# Altium PCB Wenzel_REF.PCBDOC (part 5 of 7)
Units mm, origin at the board's own origin, x right, y up, seen from the top; angles counter-clockwise.
Board outline 222.63 x 100.1 mm, 4 copper layers (Top, L2, L3, Bot), stack 1.6 mm thick; 406 components, 236 nets, 1324 pads, 1362 vias.
Unrouted connection lines stored in the file: 1.
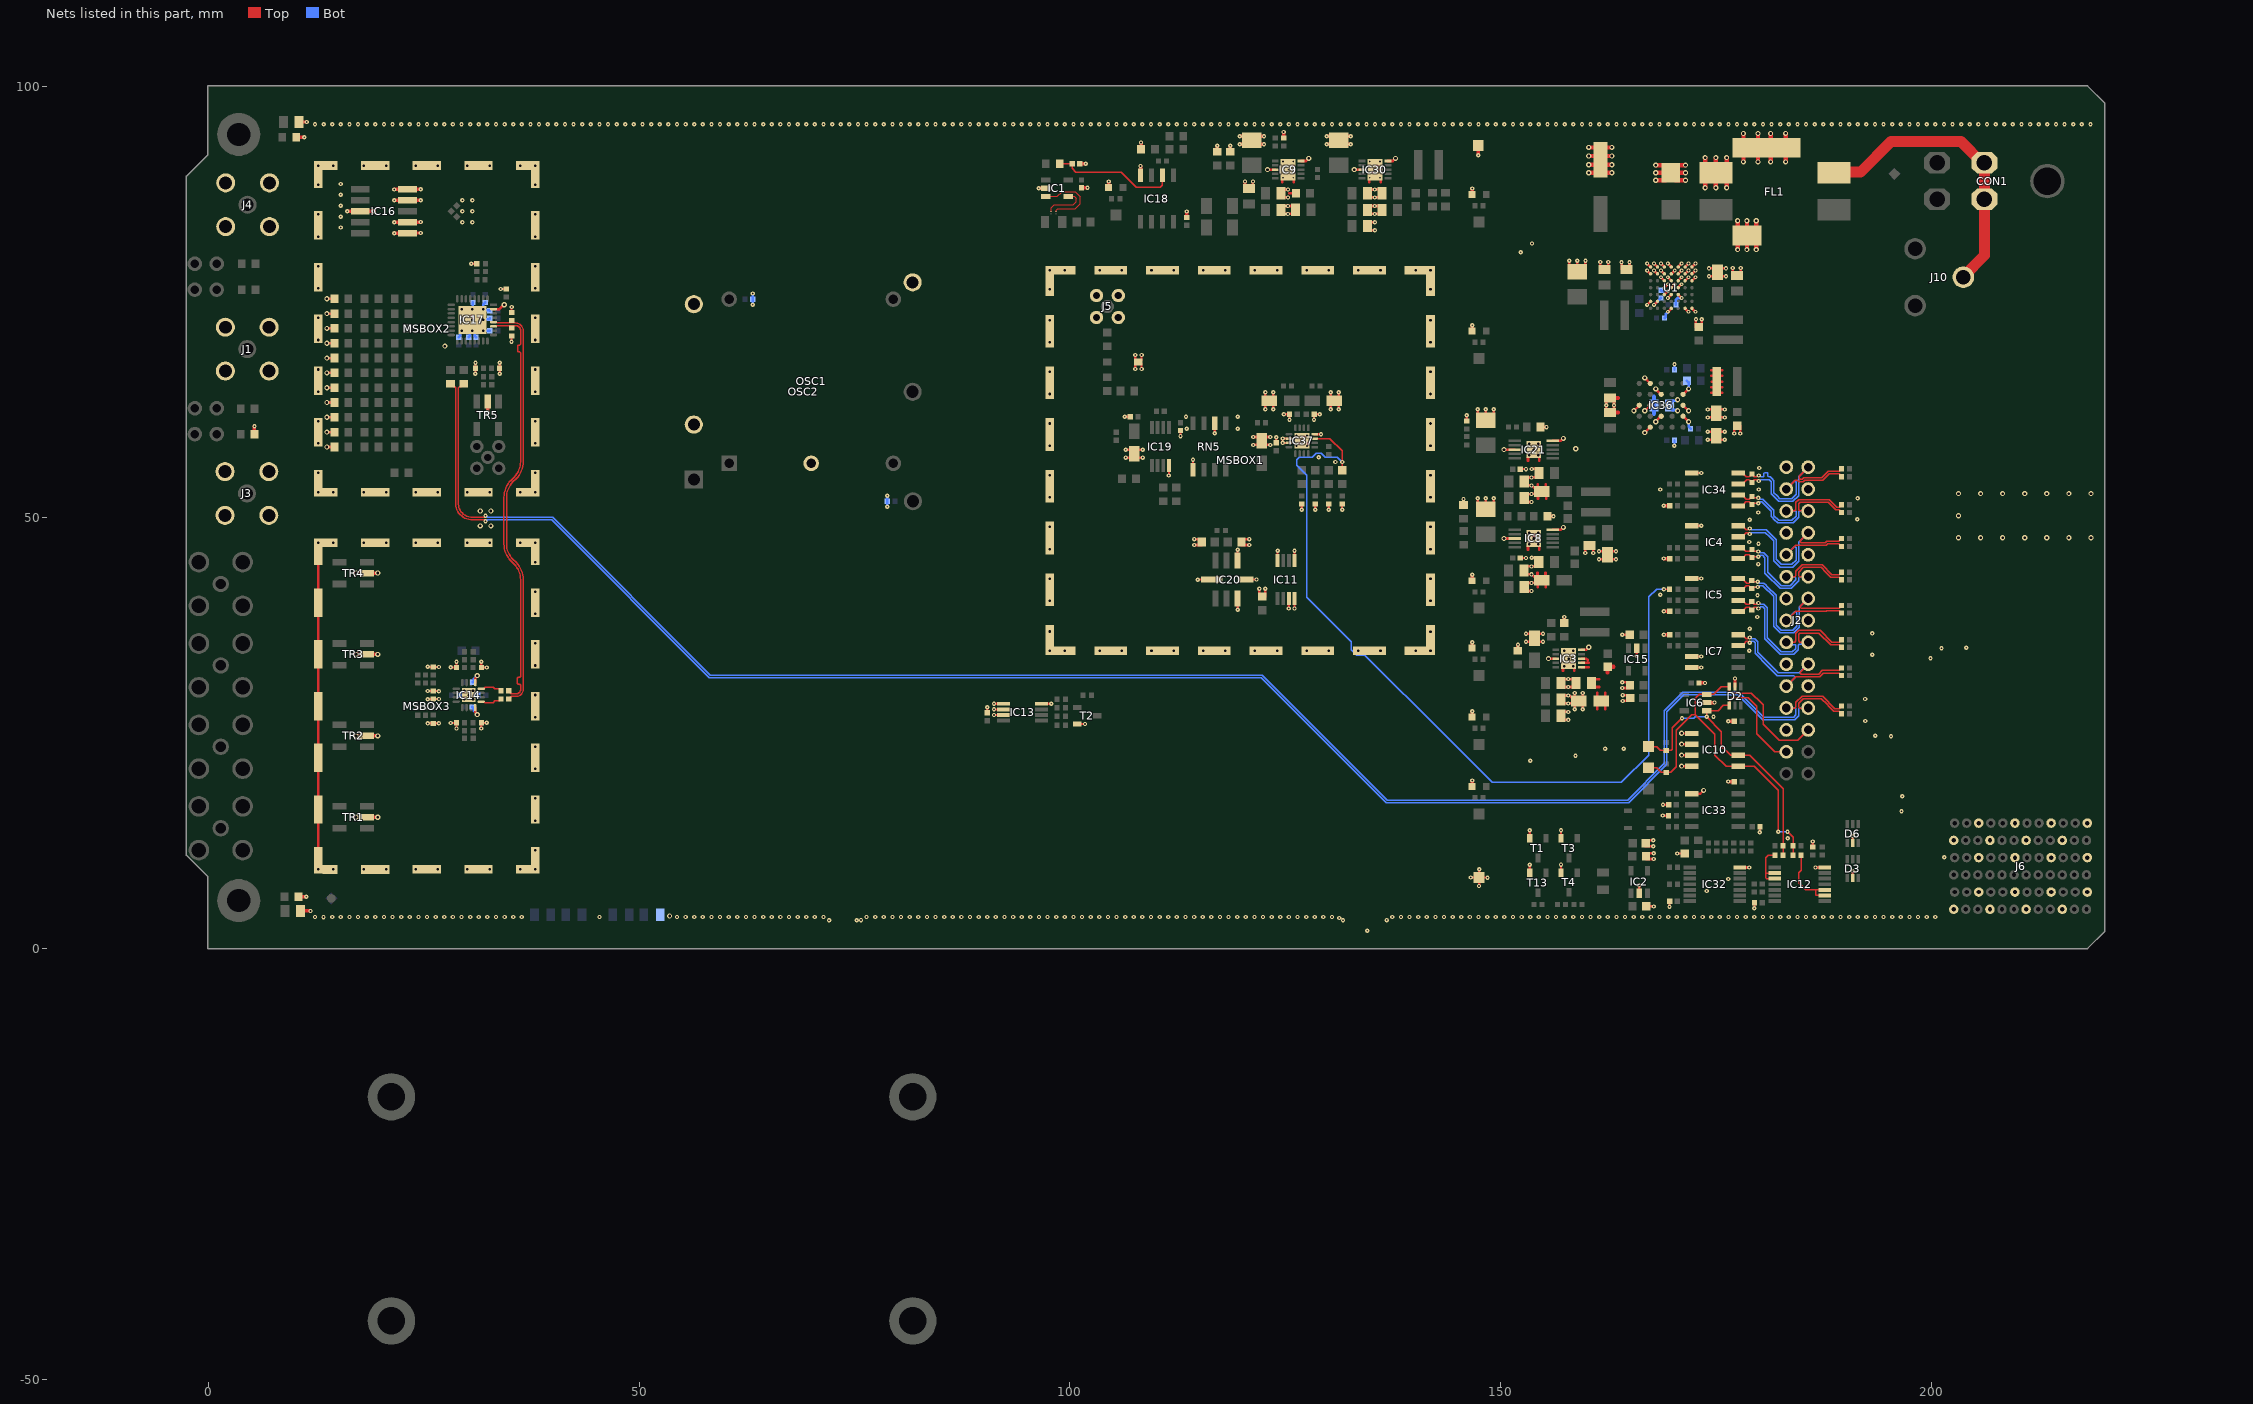
[diagram p5: the nets of this part, all layers, seen from the top]

## Via types
v1: diameter 0.5, hole 0.2, Top to Bot, tented both sides, 654 vias
v2: diameter 0.6, hole 0.3, Top to Bot, 478 vias
v3: diameter 0.5, hole 0.2, Top to Bot, 196 vias
v4: diameter 0.45, hole 0.2, Top to Bot, 34 vias

## Nets (pads, with @x,y where several pads share a name; then routed paths per layer and width w, separated by ;. In a path a pad name is that pad's centre, name@x,y a point inside that pad or via, vN(x,y) a via of type N, cw(c..) or ccw(c..) an arc to the next point about the centre after c; other vN are vias at no path point) (continued)
GND: C1.1 C2.1 C3.1 C4.1 C5.1 C6.1 C7.1 C8.1 C10.1 C12.2 C13.1 C14.1 C16.1 C17.1 C19.1 C21.1 C23.1 C24.1 C26.2 C27.1 C28.1 C30.1 C31.1 C32.2 C33.1 C36.1 C38.1 C39.1 C40.1 C42.1 C43.1 C44.1 C45.1 C48.1 C49.1 C52.1 C53.1 C54.1 C55.1 C56.1 C57.1 C58.1 C59.1 C60.2 C61.1 C62.1 C65.1 C67.2 C69.2 C70.1 C71.1 C72.1 C73.1 C74.1 C75.2 C76.1 C77.2 C78.1 C79.1 C80.1 C81.1 C82.1 C83.1 C84.1 C85.2 C86.1 C87.1 C88.1 C89.1 C90.1 C91.2 C92.1 C93.2 C94.1 C95.2 C96.1 C97.2 C98.2 C99.2 C100.1 C101.2 C102.2 C103.1 C104.1 C105.1 C108.1 C117.1 C121.1 C122.1 C123.2 C124.2 C125.1 C138.2 C142.1 C143.1 C149.1 C154.1 C167.1 D2.2 D3.2 D4.2 D6.2 D11.2 FL1.4 IC1.2 IC2.2 IC3.5 IC3.8 IC3.11 IC4.5 IC5.5 IC6.2 IC7.3 IC7.4 IC8.5 IC8.8 IC8.11 IC9.5 IC9.8 IC9.11 IC10.1 IC10.2 IC10.3 IC10.4 IC11.3 IC11.4 IC11.5 IC11.8 IC12.7 IC13.4 IC13.5 IC13.6 IC13.7 IC14.5 IC14.16 IC14.17 IC15.2 IC16.1 IC16.2 IC16.4 IC16.5 IC16.8 IC17.31 IC17.33 IC18.4 IC19.4 IC20.3 IC20.4 IC20.5 IC20.8 IC21.5 IC21.8 IC21.11 IC30.5 IC30.8 IC30.11 IC32.7 IC33.1 IC34.5 IC36.B5 IC36.C1 IC36.C2 IC36.C5 IC36.D5 IC37.2 IC37.3 IC37.12 IC37.17 J1.2 J2.1 J2.4 J2.7 J2.10 J2.13 J2.16 J2.19 J2.22 J2.25 J3.2 J4.2 J5.2 J6.A2 J6.A4 J6.A6 J6.C1 J6.C5 J6.D2 J6.D4 J6.D6 J6.F1 J6.F5 J6.G2 J6.G4 J6.G6 J6.I1 J6.I5 J6.J2 J6.J4 J6.J6 J6.L1 J6.L5 LD1.1 LD2.1 LD3.1 LD4.1 LD8.1 LD10.1 LD11.1 MSBOX1.1 MSBOX1.2 MSBOX1.3 MSBOX1.4 MSBOX1.5 MSBOX1.6 MSBOX1.7 MSBOX1.8 MSBOX1.9 MSBOX1.10 MSBOX1.11 MSBOX1.12 MSBOX1.13 MSBOX1.14 MSBOX1.15 MSBOX1.16 MSBOX1.17 MSBOX1.18 MSBOX1.19 MSBOX1.20 MSBOX1.21 MSBOX1.22 MSBOX1.23 MSBOX1.24 MSBOX1.25 MSBOX1.26 MSBOX1.27 MSBOX1.28 MSBOX2.1 MSBOX2.2 MSBOX2.3 MSBOX2.4 MSBOX2.5 MSBOX2.6 MSBOX2.7 MSBOX2.8 MSBOX2.9 MSBOX2.10 MSBOX2.11 MSBOX2.12 MSBOX2.13 MSBOX2.14 MSBOX2.15 MSBOX2.16 MSBOX2.17 MSBOX2.18 MSBOX2.19 MSBOX2.20 MSBOX3.1 MSBOX3.2 MSBOX3.3 MSBOX3.4 MSBOX3.5 MSBOX3.6 MSBOX3.7 MSBOX3.8 MSBOX3.9 MSBOX3.10 MSBOX3.11 MSBOX3.12 MSBOX3.13 MSBOX3.14 MSBOX3.15 MSBOX3.16 MSBOX3.17 MSBOX3.18 MSBOX3.19 MSBOX3.20 OSC1.2 OSC2.4 OSC2.5 OSC2.6 R11.1 R21.1 R22.2 R23.2 R25.2 R26.1 R27.2 R29.2 R30.1 R32.1 R39.2 R41.2 R42.1 R47.1 R50.1 R51.1 R64.2 R68.2 R69.2 R70.2 R73.1 R74.2 R77.1 R79.2 R80.1 R83.2 R86.2 R89.2 R93.2 R96.2 R99.2 R100.2 R101.2 R104.2 R107.2 R110.2 R114.2 R116.1 R118.2 R129.1 R130.1 R132.2 R142.1 R147.1 R155.2 R163.2 R165.2 R170.2 RN5.2 RN5.5 T1.2 T2.2 T3.2 T4.2 T13.2 TP3.1 TP4.1 TR1.2 TR2.2 TR3.2 TR4.2 TR5.2 U1.A1 U1.A2 U1.A3 U1.A7 U1.B1 U1.B2 U1.B3 U1.B7 U1.C1 U1.C2 U1.C3 U1.C4 U1.C5 U1.D1 U1.D2 U1.D3 U1.D4 U1.D5 U1.D7 U1.E1 U1.E2 U1.E3 U1.E4 U1.E5 U1.F1 U1.F2 U1.G1 U1.G2 U1.G6 | length 388.1
  Top w0.2: 147.372,92.244 TP4.1@147.372,93.119
  Top w0.254: v1@25.492,26.086 R68.2@26.127,26.086 v1@26.762,26.086 ; v1@25.492,28.896 R25.2@26.127,28.896 v1@26.762,28.896 ; v1@25.492,29.816 R27.2@26.127,29.816 v1@26.762,29.816 ; v1@25.492,32.626 R69.2@26.127,32.626 v1@26.762,32.626 ; v1@28.178,26.135 R23.2@28.813,26.135 v1@28.813,25.5 ; v1@28.178,32.565 R29.2@28.813,32.565 v1@28.813,33.2 ; v1@30.544,79.407 C49.1@31.18,79.407 ; v1@31.017,66.642 R79.2@31.017,67.278 v1@31.017,67.913 ; v1@31.693,25.5 R22.2@31.693,26.135 v1@32.328,26.135 ; v1@31.693,33.2 R70.2@31.693,32.565 v1@32.328,32.565 ; v1@33.837,66.642 R80.1@33.837,67.278 v1@33.837,67.913 ; v1@33.976,76.466 R77.1@34.611,76.466 ; v1@35.214,70.366 R73.1@35.214,71.001 ; R74.2@35.214,73.744 v1@35.214,74.38 ; C33.1@90.4,27.299 v1@90.4,27.935 ; v1@91.187,27.061 v1@91.193,27.055 ; v1@91.187,27.711 v1@91.193,27.705 ; v1@91.187,28.361 v1@91.193,28.355 ; v1@91.193,27.049 IC13.7@91.832,27.049 ; v1@91.193,27.699 IC13.6@91.832,27.699 ; v1@91.193,28.349 IC13.5@91.832,28.349 ; IC13.4@97.162,28.349 IC13.4@97.168,28.343 ; IC13.4@97.168,28.349 v1@97.807,28.349 ; v1@97.807,28.343 v1@97.813,28.338 ; T2.2@101,26.012 T2.2@101.012,26.001 ; T2.2@101.012,26.012 v1@101.734,26.012 ; v1@101.734,26.018 v1@101.746,26.007 ; v1@106.348,61.645 C70.1@106.999,61.645 ; v1(107.569,67.182) D4.2@107.57,67.833 ; D4.2@107.57,68.167 v1@107.57,68.817 ; v1(108.31,67.182) D4.2@108.31,67.833 ; D4.2@108.31,68.167 v1@108.31,68.817 ; v1(111.475,54.843) IC19.4@111.475,55.717 ; v1(112.82,59.408) C67.2@112.819,60.059 ; RN5.5@114.262,55.778 v1(114.262,56.652) ; v1(114.822,42.755) IC20.8@115.696,42.755 ; v1(116.802,59.747) RN5.2@116.802,60.621 ; IC20.5@119.451,45.332 v1(119.451,46.207) ; v1(119.462,39.265) IC20.3@119.462,40.139 ; IC20.4@120.773,42.765 v1(121.647,42.765) ; C71.1@123.936,58.625 v1@123.936,59.276 ; IC11.8@124.092,45.23 v1(124.092,46.105) ; v1@124.657,59.134 v1(124.672,59.12) ; v1(124.672,58.62) v1(124.672,59.12) ; v1@124.673,58.621 IC37.3@125.396,58.621 ; v1(124.819,61.945) C142.1@125.471,61.946 ; v1(125.392,39.399) IC11.3@125.392,40.273 ; IC37.2@125.396,59.121 124.673,59.121 v1(124.672,59.12) ; v1(125.472,61.293) C142.1@125.471,61.946 ; v1(126.042,39.399) IC11.4@126.042,40.273 ; IC11.5@126.042,45.23 v1(126.042,46.105) ; v1(126.898,50.859) R170.2@126.897,51.51 ; v1@128.322,61.295 C143.1@128.322,61.945 ; C143.1@128.322,61.947 v1@128.973,61.947 ; IC37.12@128.396,59.621 v1(129.121,59.622) ; v1@128.457,50.855 R64.2@128.456,51.506 ; v1@128.982,59.599 v1@128.983,59.601 ; v1@130.016,50.855 R163.2@130.015,51.506 ; v1@131.575,50.859 R165.2@131.575,51.511 ; R142.1@146.032,61.171 v1@146.032,61.806 ; v1@146.512,8.189 TP3.1@147.147,8.189 ; v1@147.474,7.227 TP3.1@147.474,7.862 ; TP3.1@147.475,8.517 v1@147.475,9.152 ; TP3.1@147.802,8.189 v1@148.437,8.189 ; C31.1@152.258,45.257 v1@152.893,45.257 ; C90.1@152.258,55.578 v1@152.893,55.578 ; T13.2@153.344,9.022 v1@153.344,9.658 ; T1.2@153.344,13.028 v1@153.344,13.663 ; T4.2@156.96,9.042 v1@156.96,9.677 ; T3.2@156.96,13.028 v1@156.96,13.663 ; v1@168.801,15.365 R147.1@169.436,15.365 ; v3@168.821,16.635 C81.1@169.456,16.635 ; v1@169.574,4.81 C36.1@169.574,5.445 ; v1(170.457,10.973) C79.1@171.331,10.973 ; v2(170.964,21.124) 170.964,21.104 IC10.4@172.243,21.104 ; v2(170.964,22.394) 170.964,22.374 IC10.3@172.243,22.374 ; v2(170.964,23.664) 170.964,23.644 IC10.2@172.243,23.644 ; v2(170.964,24.934) 170.964,24.914 IC10.1@172.243,24.914 ; C79.1@171.291,10.858 C79.1@171.332,10.899 ; IC33.1@172.132,17.905 172.143,17.916 173.14,17.916 v2(173.522,18.298) ; IC7.4@172.137,32.561 173.224,32.561 v1(173.229,32.566) ; IC7.3@172.137,33.831 v1@173.224,33.831 ; IC5.5@172.136,42.89 173.223,42.89 v1(173.228,42.894) ; IC4.5@172.137,49.003 173.223,49.003 v1(173.228,49.008) ; IC34.5@172.137,55.116 173.223,55.116 v1(173.228,55.121) ; v1@179.419,4.648 C78.1@179.419,5.283 ; v1@180.052,13.447 C82.1@180.052,14.082 ; R50.1@186.18,11.719 v1@186.18,12.354
  Top w0.3: MSBOX3.7@12.768,10.18 MSBOX3.6@12.768,16.08 MSBOX3.5@12.768,22.08 MSBOX3.4@12.768,28.08 MSBOX3.3@12.768,34.08 MSBOX3.2@12.768,40.08 MSBOX3.1@12.768,45.98 ; v2(13.779,58.147) R83.2@14.672,58.147 ; v2(13.779,59.866) R86.2@14.672,59.866 ; v2(13.779,61.586) R89.2@14.672,61.586 ; v2(13.779,63.305) R93.2@14.672,63.305 ; v2(13.779,65.025) R96.2@14.672,65.025 ; v2(13.779,66.744) R101.2@14.672,66.744 ; v2(13.779,68.464) R104.2@14.672,68.464 ; v2(13.779,70.183) R107.2@14.672,70.183 ; v2(13.779,71.903) R110.2@14.672,71.903 ; v2(13.779,73.622) R114.2@14.672,73.622 ; v2(13.779,75.342) R132.2@14.672,75.342 ; IC14.16@30.986,27.906 30.986,27.403 31.217,27.172 v2(31.217,27.091) ; IC14.5@30.986,30.806 30.986,31.309 31.217,31.54 v2(31.217,31.621) ; IC17.31@33.112,74.14 33.795,74.14 34.23,74.575 34.354,74.575 v2@34.359,74.57 ; v3(106.463,56.912) C69.2@107.44,56.912 ; v3(106.463,57.838) C69.2@107.435,57.838 ; C69.2@107.431,56.885 107.458,56.912 v3(108.435,56.912) ; C69.2@107.431,57.805 107.464,57.838 v3(108.435,57.838) ; v3(114.42,46.774) 114.423,46.777 C167.1@115.321,46.777 ; v3(114.42,47.456) 114.423,47.453 C167.1@115.321,47.453 ; C94.1@119.886,46.777 120.784,46.777 v3(120.787,46.774) ; C94.1@119.886,47.453 120.784,47.453 v3(120.787,47.456) ; C6.1@120.309,88.049 v3@120.309,88.947 ; C6.1@121.229,88.049 v3@121.229,88.947 ; v3(121.266,58.382) 122.238,58.382 C138.2@122.27,58.414 ; v3(121.266,59.307) 122.243,59.307 C138.2@122.27,59.334 ; v3(121.976,41.685) 121.979,41.682 C149.1@121.979,40.784 ; C138.2@122.262,59.307 v3(123.239,59.307) ; C138.2@122.267,58.382 v3(123.239,58.382) ; C12.2@122.645,63.537 122.672,63.51 v3(122.672,62.533) ; C149.1@122.655,40.784 122.655,41.682 v3(122.658,41.685) ; C12.2@122.672,63.528 v3(122.672,64.505) ; v2@122.919,90.313 122.932,90.327 IC9.8@123.81,90.327 ; C12.2@123.565,63.537 123.597,63.504 v3(123.597,62.533) ; C12.2@123.597,63.534 v3(123.597,64.505) ; C5.1@124.383,85.186 v3@125.281,85.186 ; C5.1@124.383,86.106 v3@125.281,86.106 ; C4.1@124.397,87.102 v3@125.296,87.102 ; C4.1@124.397,88.022 v3@125.296,88.022 ; 124.649,88.843 IC9.11@124.649,89.405 ; v3@125.286,85.186 C23.1@126.185,85.186 ; v3@125.286,86.106 C23.1@126.185,86.106 ; 125.451,87.596 C3.1@126.232,87.596 ; 125.971,88.845 IC9.11@125.971,89.405 ; IC9.5@126.81,91.327 127.376,91.327 127.685,91.636 v2(127.702,91.636) ; C99.2@130.228,63.537 130.255,63.51 v3(130.255,62.533) ; C99.2@130.255,63.528 v3(130.255,64.505) ; C99.2@131.148,63.537 131.18,63.504 v3(131.18,62.533) ; C99.2@131.18,63.534 v3(131.18,64.505) ; v2@132.99,90.313 133.003,90.327 IC30.8@133.881,90.327 ; C122.1@134.454,85.186 v3@135.352,85.186 ; C122.1@134.454,86.106 v3@135.352,86.106 ; C117.1@134.468,87.102 v3@135.366,87.102 ; C117.1@134.468,88.022 v3@135.366,88.022 ; C121.1@134.479,83.289 v3(135.377,83.289) ; C121.1@134.479,84.209 v3(135.377,84.209) ; 134.72,88.843 IC30.11@134.72,89.405 ; v3@135.357,85.186 C1.1@136.256,85.186 ; v3@135.357,86.106 C1.1@136.256,86.106 ; v3@135.362,87.107 C108.1@136.261,87.107 ; v3@135.362,88.027 C108.1@136.261,88.027 ; 136.042,88.845 IC30.11@136.042,89.405 ; IC30.5@136.881,91.327 137.447,91.327 137.756,91.636 v2(137.772,91.636) ; v3(147.317,52.21) 147.32,52.207 C32.2@147.32,51.309 ; v3(147.317,62.53) 147.32,62.528 C91.2@147.32,61.629 ; v3@148.24,52.207 v3@148.242,52.21 ; v3@148.24,62.528 v3@148.242,62.53 ; C32.2@148.25,51.309 v3@148.25,52.207 ; C91.2@148.25,61.629 v3@148.25,62.528 ; C32.2@149.18,51.309 149.18,52.207 v3(149.182,52.21) ; C91.2@149.18,61.629 149.18,62.528 v3(149.182,62.53) ; v2(150.352,47.527) IC8.8@151.601,47.527 ; v2(150.352,57.847) IC21.8@151.601,57.847 ; C30.1@152.64,41.439 v3@153.538,41.439 ; C30.1@152.64,42.359 v3@153.538,42.359 ; C28.1@152.64,43.364 v3@153.538,43.364 ; C28.1@152.64,44.284 v3@153.538,44.284 ; C83.1@152.64,51.759 v3@153.538,51.759 ; C83.1@152.64,52.679 v3@153.538,52.679 ; C96.1@152.64,53.684 v3@153.538,53.684 ; C96.1@152.64,54.604 v3@153.538,54.604 ; v3(152.9,35.544) C101.2@153.877,35.544 ; v3(152.9,36.47) C101.2@153.871,36.47 ; 153.14,46.241 IC8.11@153.14,46.606 ; 153.14,56.561 IC21.11@153.14,56.926 ; v3@153.51,43.367 153.576,43.367 C26.2@154.329,42.613 ; v3@153.51,53.687 153.576,53.687 C85.2@154.329,52.934 ; v3@153.544,42.414 C26.2@154.286,42.414 ; v3@153.544,44.289 C27.1@154.442,44.289 ; v3@153.544,52.734 C85.2@154.442,52.734 ; v3@153.544,54.61 C92.1@154.442,54.61 ; v3@153.57,45.275 C27.1@154.469,45.275 ; v3@153.57,55.595 C92.1@154.469,55.595 ; C101.2@153.868,35.517 153.895,35.544 v3(154.872,35.544) ; C101.2@153.868,36.437 153.9,36.47 v3(154.872,36.47) ; C26.2@154.244,43.194 154.244,43.559 ; C85.2@154.264,53.469 154.264,53.834 ; 154.286,41.875 C26.2@154.286,42.414 ; C26.2@154.286,42.71 C26.2@154.286,42.414 ; 154.306,52.15 C85.2@154.306,52.985 ; C26.2@154.442,42.414 C26.2@154.286,42.414 ; 154.462,46.241 IC8.11@154.462,46.606 ; 154.462,56.561 IC21.11@154.462,56.926 ; C26.2@154.719,42.719 154.742,42.719 155.217,42.244 155.217,41.879 ; C85.2@154.739,52.994 154.762,52.994 155.237,52.519 155.237,52.154 ; C26.2@155.175,42.728 155.175,43.563 ; C85.2@155.195,53.003 155.195,53.838 ; v2@155.522,33.585 155.534,33.597 IC3.8@156.36,33.597 ; IC8.5@156.001,48.527 156.924,48.527 157.213,48.815 v2(157.25,48.815) ; IC21.5@156.001,58.847 156.924,58.847 157.213,59.136 v2(157.25,59.136) ; C16.1@156.897,26.482 v3@157.796,26.482 ; C16.1@156.897,27.402 v3@157.796,27.402 ; C14.1@156.897,28.39 v3@157.796,28.39 ; C14.1@156.897,29.31 v3@157.796,29.31 ; C17.1@156.897,30.299 v3@157.796,30.299 ; C17.1@156.897,31.219 v3@157.796,31.219 ; 157.199,32.188 IC3.11@157.199,32.676 ; v3@157.767,29.312 157.953,29.312 C102.2@158.358,28.907 ; v3@157.801,28.39 C102.2@158.699,28.39 ; v3@157.801,30.299 C2.1@158.699,30.299 ; v3@157.801,31.219 C2.1@158.699,31.219 ; v3(157.937,79.766) 157.94,79.764 C124.2@157.94,78.865 ; 158.521,32.188 IC3.11@158.521,32.676 ; v3(158.561,27.73) v3(158.561,29.603) ; C102.2@158.561,28.681 C102.2@158.594,28.649 ; v3@158.86,79.764 v3@158.863,79.766 ; C124.2@158.87,78.865 v3@158.87,79.764 ; IC3.5@159.36,34.597 159.872,34.597 160.183,34.908 v2(160.197,34.908) ; v3(159.487,27.73) v3(159.487,29.603) ; C102.2@159.487,28.676 C102.2@159.514,28.649 ; v3(159.796,45.844) 159.799,45.846 C65.1@159.799,46.745 ; C124.2@159.8,78.865 159.8,79.764 v3(159.803,79.766) ; C65.1@160.719,46.745 160.719,45.846 v3(160.722,45.844) ; v3(161.375,45.126) 162.347,45.126 C77.2@162.379,45.158 ; v3(161.375,46.051) 162.352,46.051 C77.2@162.379,46.078 ; v3(161.537,79.616) 161.54,79.613 C125.1@161.54,78.715 ; v3@162.238,62.98 162.238,62.589 C73.1@162.679,62.148 163.119,62.589 v3@163.119,62.98 ; v3@162.238,62.986 162.238,63.377 C21.1@162.679,63.818 163.119,63.377 v3@163.119,62.986 ; C77.2@162.371,46.051 v3(163.348,46.051) ; C77.2@162.376,45.126 v3(163.348,45.126) ; C125.1@162.46,78.715 162.46,79.613 v3(162.463,79.616) ; v3(163.991,79.586) 164.007,79.57 164.007,78.805 C72.1@164.097,78.715 ; v3@164.074,36.355 C100.1@164.972,36.355 ; v3(164.077,30.175) 164.08,30.178 C103.1@164.978,30.178 ; v3(164.077,30.857) 164.08,30.854 C103.1@164.978,30.854 ; v3(164.127,28.675) 164.13,28.678 C104.1@165.028,28.678 ; v3(164.127,29.357) 164.13,29.354 C104.1@165.028,29.354 ; C72.1@164.916,78.815 v3(164.916,79.586) ; v2(165.422,62.348) IC36.C1@166.057,62.983 ; v3(165.755,33.898) 165.758,33.901 165.758,34.799 IC15.2@165.76,34.802 ; IC2.2@166.046,6.389 166.049,6.392 166.049,7.29 v3(166.051,7.293) ; v2(166.692,62.348) IC36.C2@167.327,62.983 ; C13.1@166.778,11.837 167.677,11.837 v3(167.679,11.835) ; C13.1@166.778,12.514 167.677,12.514 v3(167.679,12.516) ; C10.1@166.828,10.337 167.727,10.337 v3(167.729,10.335) ; C10.1@166.828,11.014 167.727,11.014 v3(167.729,11.016) ; C8.1@166.834,4.836 v3@167.732,4.836 ; v4(166.966,74.632) U1.G6@167.366,75.032 ; v4(166.966,78.632) U1.G2@167.366,78.232 ; v4(166.966,79.432) U1.G1@167.366,79.032 ; v4(167.766,78.632) U1.F2@168.166,78.232 ; v4(167.766,79.432) U1.F1@168.166,79.032 ; v4(168.566,77.832) U1.E3@168.966,77.432 ; v4(168.566,78.632) U1.E2@168.966,78.232 ; v4(168.566,79.432) U1.E1@168.966,79.032 ; U1.E5@168.966,75.832 v4(169.366,76.232) ; U1.E4@168.966,76.632 v4(169.366,77.032) ; v4(169.366,73.832) U1.D7@169.766,74.232 ; v4(169.366,75.432) U1.D5@169.766,75.832 ; v4(169.366,77.832) U1.D3@169.766,77.432 ; v4(169.366,79.432) U1.D1@169.766,79.032 ; U1.D4@169.766,76.632 v4(170.166,77.032) ; U1.D2@169.766,78.232 v4(170.166,78.632) ; U1.C5@170.566,75.832 v4(170.966,75.432) ; U1.C4@170.566,76.632 v4(170.966,77.032) ; U1.C3@170.566,77.432 v4(170.966,77.832) ; U1.C2@170.566,78.232 v4(170.966,78.632) ; U1.C1@170.566,79.032 v4(170.966,79.432) ; IC36.D5@171.137,61.713 v2(171.772,61.078) ; IC36.C5@171.137,62.983 v2(171.772,62.348) ; IC36.B5@171.137,64.253 v2(171.772,64.888) ; U1.B7@171.366,74.232 v4(171.766,73.832) ; U1.B3@171.366,77.432 v4(171.766,77.832) ; U1.B2@171.366,78.232 v4(171.766,78.632) ; U1.B1@171.366,79.032 v4(171.766,79.432) ; U1.A7@172.166,74.232 v4(172.566,73.832) ; U1.A3@172.166,77.432 v4(172.566,77.832) ; U1.A2@172.166,78.232 v4(172.566,78.632) ; U1.A1@172.166,79.032 v4(172.566,79.432) ; v3(172.625,72.966) 172.628,72.963 C7.1@172.628,72.065 ; C7.1@173.304,72.065 173.304,72.963 v3(173.307,72.966) ; v3(173.986,58.976) 174.958,58.976 C75.2@174.99,59.008 ; v3(173.986,59.901) 174.963,59.901 C75.2@174.99,59.928 ; v3(174.134,77.94) 175.106,77.94 C60.2@175.138,77.972 ; v3(174.134,78.865) 175.111,78.865 C60.2@175.138,78.892 ; C75.2@174.981,59.901 v3(175.958,59.901) ; C75.2@174.987,58.976 v3(175.958,58.976) ; C60.2@175.129,78.865 v3(176.106,78.865) ; C60.2@175.135,77.94 v3(176.106,77.94) ; v3(176.907,78.916) 176.91,78.913 C105.1@176.91,78.015 ; v3(177.079,59.72) 177.082,59.723 C74.1@177.082,60.621 ; IC32.7@177.732,9.355 v3(178.828,9.355) ; v3@177.758,59.723 C74.1@177.758,60.621 ; C105.1@177.83,78.015 177.83,78.913 v3(177.833,78.916) ; v3(186.503,9.355) IC12.7@187.599,9.355 ; D3.2@190.825,8.117 v3(190.825,8.905) ; D6.2@190.825,12.193 v3(190.826,12.981)
  Top w0.4: R118.2@5.376,59.64 5.377,59.642 5.377,60.54 v1(5.379,60.541) ; R129.1@10.214,94.075 v1(11.139,94.075) ; R130.1@10.475,5.95 v1(11.4,5.95) ; C95.2@10.525,95.85 v1(11.45,95.85) ; C97.2@10.95,4.314 v1(11.875,4.314) ; v1(16.133,85.489) IC16.8@17.008,85.489 ; v2(17.187,15.18) TR1.2@18.08,15.18 ; v2(17.187,24.627) TR2.2@18.08,24.627 ; v2(17.187,34.073) TR3.2@18.08,34.073 ; v2(17.187,43.52) TR4.2@18.08,43.52 ; IC16.8@18.332,85.511 v1(19.207,85.511) ; TR1.2@18.78,15.18 v2(19.673,15.18) ; TR2.2@18.78,24.627 v2(19.673,24.627) ; TR3.2@18.78,34.073 v2(19.673,34.073) ; TR4.2@18.78,43.52 v2(19.673,43.52) ; v1(21.593,82.949) IC16.1@22.468,82.949 ; v1(21.593,84.219) IC16.2@22.468,84.219 ; v1(21.593,86.759) IC16.4@22.468,86.759 ; v1(21.593,88.029) IC16.5@22.468,88.029 ; IC16.1@23.792,82.971 v1(24.667,82.971) ; IC16.2@23.792,84.241 v1(24.667,84.241) ; IC16.4@23.792,86.781 v1(24.667,86.781) ; IC16.5@23.792,88.051 v1(24.667,88.051) ; v2(32.423,62.175) TR5.2@32.423,63.068 ; v2@53.523,3.754 v2(53.549,3.728) ; v1@96.375,88.16 IC1.2@97.057,88.16 ; C52.1@101.149,90.99 v1@101.831,90.99 ; C53.1@101.334,88.222 v1@102.016,88.222 ; LD3.1@104.49,88.258 v1@104.49,88.939 ; IC18.4@108.186,90.05 v1@108.186,90.732 ; R99.2@108.25,92.781 v1@108.25,93.463 ; C62.1@113.55,84.767 v1@113.55,85.449 ; R51.1@117.087,92.401 v1@117.087,93.083 ; R116.1@118.608,92.401 v1@118.608,93.083 ; v1@119.718,93.265 C123.2@120.4,93.265 ; v1@119.718,94.188 C123.2@120.4,94.188 ; C123.2@121.816,93.265 v1@122.498,93.265 ; C123.2@121.816,94.188 v1@122.498,94.188 ; R47.1@124.785,93.993 v1@124.785,94.675 ; v1@129.789,93.265 C93.2@130.471,93.265 ; v1@129.789,94.188 C93.2@130.471,94.188 ; C93.2@131.887,93.265 v1@132.569,93.265 ; C93.2@131.887,94.188 v1@132.569,94.188 ; R41.2@145.655,51.408 v1@145.655,52.09 ; LD1.1@146.65,18.75 146.65,19.432 v1(146.658,19.44) ; LD8.1@146.65,26.804 146.65,27.486 v1(146.658,27.494) ; LD11.1@146.65,34.804 146.65,35.486 v1(146.658,35.494) ; LD4.1@146.65,42.627 146.65,43.309 v1(146.658,43.317) ; LD2.1@146.65,71.582 146.65,72.264 v1(146.658,72.272) ; LD10.1@146.65,87.448 146.65,88.13 v1(146.658,88.138) ; v1(147.364,91.992) 147.372,92 TP4.1@147.372,92.682 ; R39.2@151.968,34.505 v1@151.968,35.187 ; R100.2@154.601,60.46 v1@155.283,60.46 ; R42.1@155.41,50.122 v1@156.092,50.122 ; R32.1@157.341,37.723 v1@157.341,38.404 ; v1@168.9,36.358 168.908,36.366 C89.1@169.59,36.366 ; v1@168.907,45.188 C86.1@169.589,45.188 ; v1@168.907,51.306 C84.1@169.589,51.306 ; v1(168.909,39.083) 168.917,39.075 C87.1@169.599,39.075 ; C88.1@172.982,30.764 173.664,30.764 v1(173.672,30.756) ; IC6.2@173.868,28.481 173.877,28.491 174.766,28.491 v1(174.775,28.5) ; v1(176.386,19.322) 176.394,19.314 C80.1@177.076,19.314 ; v1(176.386,26.331) 176.394,26.323 C38.1@177.076,26.323 ; D2.2@177.16,30.35 177.16,31.273 v1(177.162,31.275)
  Top w0.5: v2(160.199,89.967) C98.2@161.384,89.967 ; v2(160.199,90.898) C98.2@161.363,90.898 ; v2(160.199,91.906) C98.2@161.413,91.906 ; v2(160.199,92.901) C98.2@161.413,92.901 ; C98.2@161.668,91.906 v2(162.881,91.906) ; C98.2@161.668,92.901 v2(162.881,92.901) ; C98.2@161.696,89.967 v2(162.881,89.967) ; C98.2@161.717,90.898 v2(162.881,90.898) ; C73.1@162.679,62.148 163.577,62.148 ; C21.1@162.679,63.818 163.577,63.818 ; v2(167.973,89.097) D11.2@169.137,89.097 ; v2(167.973,89.972) D11.2@169.137,89.972 ; v2(167.973,90.847) D11.2@169.137,90.847 ; D11.2@170.248,89.097 v2(171.412,89.097) ; D11.2@170.248,89.972 v2(171.412,89.972) ; D11.2@170.248,90.847 v2(171.412,90.847) ; v2(173.692,88.217) FL1.4@173.692,89.381 ; FL1.4@173.692,90.563 v2(173.692,91.727) ; v2(174.942,88.222) FL1.4@174.942,89.386 ; FL1.4@174.942,90.558 v2(174.942,91.722) ; v2(176.192,88.217) FL1.4@176.192,89.381 ; FL1.4@176.192,90.563 v2(176.192,91.727) ; v2(177.461,81.053) FL1.4@177.461,82.217 ; FL1.4@177.467,83.227 v2(177.467,84.391) ; v2(178.136,91.228) FL1.4@178.136,92.392 ; FL1.4@178.136,93.353 v2(178.136,94.516) ; v2(178.542,81.053) FL1.4@178.542,82.217 ; FL1.4@178.542,83.227 v2(178.542,84.391) ; FL1.4@179.617,83.227 v2(179.617,84.391) ; v2(179.622,81.053) FL1.4@179.622,82.217 ; v2(179.833,91.222) FL1.4@179.833,92.386 ; FL1.4@179.833,93.358 v2(179.833,94.522) ; v2(181.296,91.222) FL1.4@181.296,92.386 ; FL1.4@181.296,93.358 v2(181.296,94.522) ; v2(183.036,91.217) FL1.4@183.036,92.381 ; FL1.4@183.036,93.363 v2(183.036,94.527)
  Bot w0.254: v1(63.201,74.649) C40.1@63.2,75.3 v1(63.199,75.951) ; v1(78.801,51.199) C48.1@78.8,51.85 v1@78.8,52.501 ; v1@170.132,58.307 C154.1@170.132,58.943 ; C76.1@170.132,67.093 v1@170.132,67.728
  Bot w0.3: C55.1@29.09,70.881 29.25,71.041 29.25,71.396 29.412,71.558 v2(29.412,71.64) ; v2(29.74,28.856) 29.673,28.856 C39.1@29.173,29.356 29.673,29.856 v2(29.74,29.856) ; C44.1@30.229,70.881 30.368,71.021 30.368,71.341 v2@30.662,71.635 ; C43.1@30.651,27.971 30.811,27.811 30.811,27.578 v2@31.183,27.206 ; v2(30.662,71.639) v2@30.662,71.635 ; v2(30.662,74.14) 30.686,74.164 30.686,74.874 C58.1@30.724,74.912 ; C45.1@30.686,30.856 30.846,31.016 30.846,31.25 v2(31.217,31.621) ; C61.1@31.077,70.881 30.917,71.041 30.917,71.314 30.662,71.568 v2@30.662,71.635 ; v2(31.912,71.64) C54.1@32.692,71.64 ; v2(31.912,72.89) 31.97,72.947 32.565,72.947 C56.1@32.692,73.074 ; C59.1@32.15,74.912 31.932,74.694 31.932,74.16 v2(31.912,74.14) 31.993,74.14 32.132,74.001 32.624,74.001 C57.1@32.692,73.933 ; C24.1@168.566,76.332 168.666,76.232 v4(169.366,76.232) ; R30.1@168.99,73.113 169.13,73.253 169.13,73.582 169.366,73.818 v4(169.366,73.832) ; C19.1@169.747,62.544 169.859,62.433 170.336,62.433 170.421,62.348 v2(170.502,62.348) ; C19.1@169.765,63.333 169.765,63.355 169.943,63.533 170.336,63.533 170.421,63.618 v2(170.502,63.618) ; R11.1@170.306,74.632 170.306,75.237 170.502,75.432 v4(170.966,75.432) ; R26.1@171.577,65.818 171.772,65.623 v2(171.772,64.888) ; v2(171.772,61.078) 171.772,60.498 172.007,60.263 R21.1@172.007,60.243
  other v1: 134.5,2 72.069,3.224 75.261,3.224 131.685,3.222 131.685,3.222 72.047,3.247 75.75,3.25 136.75,3.25 136.75,3.25 131.25,3.5 12.4,3.6 13.386,3.598 14.4,3.6 15.4,3.6 16.4,3.6 17.4,3.6 18.4,3.6 19.4,3.6 20.4,3.6 21.4,3.6 22.4,3.6 23.4,3.6 24.4,3.6 25.4,3.6 26.4,3.6 27.4,3.6 28.4,3.6 29.4,3.6 30.4,3.6 31.4,3.6 32.4,3.6 33.4,3.6 34.4,3.6 35.4,3.6 36.4,3.6 45.4,3.6 54.4,3.6 55.4,3.6 56.4,3.6 57.4,3.6 58.4,3.6 59.4,3.6 60.4,3.6 61.4,3.6 62.4,3.6 63.4,3.6 64.4,3.6 65.4,3.6 66.4,3.6 67.4,3.6 68.4,3.6 69.4,3.6 70.4,3.6 71.4,3.6 76.4,3.6 77.4,3.6 78.4,3.6 79.4,3.6 80.4,3.6 81.4,3.6 82.4,3.6 83.4,3.6 84.4,3.6 85.4,3.6 86.4,3.6 87.4,3.6 88.4,3.6 89.4,3.6 90.4,3.6 91.4,3.6 92.4,3.6 93.4,3.6 94.4,3.6 95.4,3.6 96.4,3.6 97.4,3.6 98.4,3.6 99.4,3.6 100.4,3.6 101.4,3.6 102.4,3.6 103.4,3.6 104.4,3.6 105.4,3.6 106.4,3.6 107.4,3.6 108.4,3.6 109.4,3.6 110.4,3.6 111.4,3.6 112.4,3.6 113.4,3.6 114.4,3.6 115.4,3.6 116.4,3.6 117.4,3.6 118.4,3.6 119.4,3.6 120.4,3.6 121.4,3.6 122.4,3.6 123.4,3.6 124.4,3.6 125.4,3.6 126.4,3.6 127.4,3.6 128.4,3.6 129.4,3.6 130.4,3.6 137.4,3.6 138.4,3.6 139.4,3.6 140.4,3.6 141.4,3.6 142.4,3.6 143.4,3.6 144.4,3.6 145.4,3.6 146.4,3.6 147.4,3.6 148.4,3.6 149.4,3.6 150.4,3.6 151.4,3.6 152.4,3.6 153.4,3.6 154.4,3.6 155.4,3.6 156.4,3.6 157.4,3.6 158.4,3.6 159.4,3.6 160.4,3.6 161.4,3.6 162.4,3.6 163.4,3.6 164.4,3.6 165.4,3.6 166.4,3.6 167.4,3.6 168.4,3.6 169.4,3.6 170.4,3.6 171.4,3.6 172.4,3.6 173.4,3.6 174.4,3.6 175.4,3.6 176.4,3.6 177.4,3.6 178.4,3.6 179.4,3.6 180.4,3.6 181.4,3.6 182.4,3.6 183.4,3.6 184.4,3.6 185.4,3.6 186.4,3.6 187.4,3.6 188.4,3.6 189.4,3.6 190.4,3.6 191.4,3.6 192.4,3.6 193.4,3.6 194.4,3.6 195.4,3.6 196.4,3.6 197.4,3.6 198.4,3.6 199.4,3.6 200.4,3.6 179.406,4.635 169.561,4.797 147.461,7.214 148.45,8.176 146.499,8.203 147.488,9.165 153.357,9.671 156.973,9.69 201.429,10.557 186.18,12.368 183.287,12.748 180.039,13.434 153.357,13.676 156.973,13.676 168.788,15.378 196.469,15.886 196.581,17.633 195.263,24.592 193.431,24.631 28.826,25.487 31.706,25.487 101.746,26.012 25.479,26.073 26.775,26.099 28.165,26.122 32.341,26.148 192.258,26.35 174.668,26.849 91.187,27.049 91.187,27.699 90.413,27.948 91.187,28.349 97.813,28.349 25.479,28.883 26.775,28.909 192.255,28.893 26.775,29.803 25.479,29.829 32.341,32.552 28.165,32.578 26.775,32.613 25.479,32.639 28.826,33.213 31.706,33.213 199.846,33.623 173.229,33.836 193.078,34.053 178.827,34.489 201.111,34.808 204.005,34.843 151.976,35.195 168.909,36.358 193.078,36.515 178.885,37.071 157.349,38.412 179.754,38.423 179.78,40.928 168.485,41.009 179.854,44.556 168.899,45.196 152.906,45.257 179.879,46.913 178.827,47.121 178.884,49.703 191.351,49.762 156.1,50.114 179.85,50.537 128.457,50.854 130.017,50.854 131.576,50.859 168.899,51.314 145.663,52.098 191.385,52.198 78.799,52.501 168.475,53.206 179.914,53.222 152.906,55.578 179.972,55.716 130.795,56.404 128.874,56.961 126.291,58.263 127.502,58.263 170.119,58.294 126.896,58.871 123.935,59.276 126.291,59.478 127.502,59.478 155.291,60.452 128.323,61.294 106.347,61.644 146.032,61.819 128.974,61.947 31.004,66.629 33.824,66.629 170.145,67.741 31.03,67.926 33.85,67.926 107.569,68.818 108.31,68.818 35.201,70.353 35.227,74.393 33.963,76.479 30.531,79.42 15.4,83.604 29.504,84.227 30.662,84.227 15.4,84.864 113.542,85.457 29.504,85.5 30.662,85.5 15.4,86.134 29.504,86.773 30.662,86.773 15.4,87.414 96.367,88.152 102.024,88.23 15.4,88.666 104.482,88.947 124.714,89.391 125.906,89.391 134.785,89.391 135.977,89.391 125.31,90.327 135.381,90.327 108.186,90.74 101.839,90.998 124.714,91.262 125.906,91.262 134.785,91.262 135.977,91.262 117.087,93.091 118.608,93.091 119.71,93.265 122.506,93.265 129.781,93.265 132.577,93.265 108.25,93.471 119.71,94.188 122.506,94.188 129.781,94.188 132.577,94.188 124.785,94.683 12.4,95.6 13.4,95.6 14.4,95.6 15.4,95.6 16.4,95.6 17.4,95.6 18.4,95.6 19.4,95.6 20.4,95.6 21.4,95.6 22.4,95.6 23.4,95.6 24.4,95.6 25.4,95.6 26.4,95.6 27.4,95.6 28.4,95.6 29.4,95.6 30.4,95.6 31.4,95.6 32.4,95.6 33.4,95.6 34.4,95.6 35.4,95.6 36.4,95.6 37.4,95.6 38.4,95.6 39.4,95.6 40.4,95.6 41.4,95.6 42.4,95.6 43.4,95.6 44.4,95.6 45.4,95.6 46.4,95.6 47.4,95.6 48.4,95.6 49.4,95.6 50.4,95.6 51.4,95.6 52.4,95.6 53.4,95.6 54.4,95.6 55.4,95.6 56.4,95.6 57.4,95.6 58.4,95.6 59.4,95.6 60.4,95.6 61.4,95.6 62.4,95.6 63.4,95.6 64.4,95.6 65.4,95.6 66.4,95.6 67.4,95.6 68.4,95.6 69.4,95.6 70.4,95.6 71.4,95.6 72.4,95.6 73.4,95.6 74.4,95.6 75.4,95.6 76.4,95.6 77.4,95.6 78.4,95.6 79.4,95.6 80.4,95.6 81.4,95.6 82.4,95.6 83.4,95.6 84.4,95.6 85.4,95.6 86.4,95.6 87.4,95.6 88.4,95.6 89.4,95.6 90.4,95.6 91.4,95.6 92.4,95.6 93.4,95.6 94.4,95.6 95.4,95.6 96.4,95.6 97.4,95.6 98.4,95.6 99.4,95.6 100.4,95.6 101.4,95.6 102.4,95.6 103.4,95.6 104.4,95.6 105.4,95.6 106.4,95.6 107.4,95.6 108.4,95.6 109.4,95.6 110.4,95.6 111.4,95.6 112.4,95.6 113.4,95.6 114.4,95.6 115.4,95.6 116.4,95.6 117.4,95.6 118.4,95.6 119.4,95.6 120.4,95.6 121.4,95.6 122.4,95.6 123.4,95.6 124.4,95.6 125.4,95.6 126.4,95.6 127.4,95.6 128.4,95.6 129.4,95.6 130.4,95.6 131.4,95.6 132.4,95.6 133.4,95.6 134.4,95.6 135.4,95.6 136.4,95.6 137.4,95.6 138.4,95.6 139.4,95.6 140.4,95.6 141.4,95.6 142.4,95.6 143.4,95.6 144.4,95.6 145.4,95.6 146.4,95.6 147.4,95.6 148.4,95.6 149.4,95.6 150.4,95.6 151.4,95.6 152.4,95.6 153.4,95.6 154.4,95.6 155.4,95.6 156.4,95.6 157.4,95.6 158.4,95.6 159.4,95.6 160.4,95.6 161.4,95.6 162.4,95.6 163.4,95.6 164.4,95.6 165.4,95.6 166.4,95.6 167.4,95.6 168.4,95.6 169.4,95.6 170.4,95.6 171.4,95.6 172.4,95.6 173.4,95.6 174.4,95.6 175.4,95.6 176.4,95.6 177.4,95.6 178.4,95.6 179.4,95.6 180.4,95.6 181.4,95.6 182.4,95.6 183.4,95.6 184.4,95.6 185.4,95.6 186.4,95.6 187.4,95.6 188.4,95.6 189.4,95.6 190.4,95.6 191.4,95.6 192.4,95.6 193.4,95.6 194.4,95.6 195.4,95.6 196.4,95.6 197.4,95.6 198.4,95.6 199.4,95.6 200.4,95.6 201.4,95.6 202.4,95.6 203.4,95.6 204.4,95.6 205.4,95.6 206.4,95.6 207.4,95.6 208.4,95.6 209.4,95.6 210.4,95.6 211.4,95.6 212.4,95.6 213.4,95.6 214.4,95.6 215.4,95.6 216.4,95.6 217.4,95.6 218.4,95.6
  other v2: 12.768,9.13 14.5,9.13 18.08,9.13 20.656,9.13 24.08,9.13 26.656,9.13 30.08,9.13 32.656,9.13 36.236,9.13 37.968,9.13 37.968,11.37 37.968,14.792 37.968,17.368 37.968,20.792 37.968,23.368 37.968,26.792 30.731,28.856 30.236,29.356 37.968,29.368 30.731,29.856 157.339,32.706 158.38,32.706 37.968,32.792 155.522,33.597 157.86,33.597 97.656,34.5 99.388,34.5 103.453,34.5 106.029,34.5 109.453,34.5 112.029,34.5 115.453,34.5 118.029,34.5 121.453,34.5 124.029,34.5 127.453,34.5 130.029,34.5 133.453,34.5 136.029,34.5 140.094,34.489 141.826,34.489 157.339,34.489 158.38,34.489 37.968,35.368 97.656,36.74 141.826,36.729 37.968,38.792 97.656,40.297 141.826,40.297 37.968,41.368 97.656,42.873 141.826,42.873 37.968,44.79 97.656,46.297 141.826,46.297 153.273,46.845 154.329,46.845 12.768,47.03 14.5,47.03 18.08,47.03 20.656,47.03 24.08,47.03 26.656,47.03 30.08,47.03 32.656,47.03 36.236,47.03 37.968,47.03 153.801,47.527 203.088,47.612 205.651,47.612 208.213,47.612 210.776,47.612 213.339,47.612 215.901,47.612 218.464,47.612 153.273,48.208 154.329,48.208 97.656,48.873 141.826,48.873 31.567,48.986 32.806,48.986 203.088,50.175 31.567,50.714 32.806,50.714 97.656,52.297 141.826,52.297 203.088,52.738 205.651,52.738 208.213,52.738 210.776,52.738 213.339,52.738 215.901,52.738 218.464,52.738 12.768,52.894 14.5,52.894 18.08,52.894 20.656,52.894 24.08,52.894 26.656,52.894 30.08,52.894 32.656,52.894 36.236,52.894 37.968,52.894 97.656,54.873 141.826,54.873 12.768,55.134 37.968,55.134 153.273,57.166 154.329,57.166 153.801,57.847 158.673,57.941 97.656,58.297 141.826,58.297 153.273,58.529 154.329,58.529 12.768,58.556 37.968,58.556 97.656,60.873 141.826,60.873 12.768,61.132 37.968,61.132 97.656,64.297 141.826,64.297 12.768,64.556 37.968,64.556 97.656,66.873 141.826,66.873 12.768,67.132 37.968,67.132 27.47,69.847 97.656,70.297 141.826,70.297 12.768,70.556 37.968,70.556 97.656,72.873 141.826,72.873 29.412,72.89 30.662,72.89 12.768,73.132 37.968,73.132 29.412,74.14 34.361,74.64 97.656,76.43 141.826,76.43 12.768,76.556 37.968,76.556 97.656,78.67 99.388,78.67 103.453,78.67 106.029,78.67 109.453,78.67 112.029,78.67 115.453,78.67 118.029,78.67 121.453,78.67 124.029,78.67 127.453,78.67 130.029,78.67 133.453,78.67 136.029,78.67 140.094,78.67 141.826,78.67 12.768,79.132 37.968,79.132 12.768,82.556 37.968,82.556 12.768,85.132 37.968,85.132 12.768,88.554 37.968,88.554 122.919,90.327 132.99,90.327 12.768,90.794 14.5,90.794 18.08,90.794 20.656,90.794 24.08,90.794 26.656,90.794 30.08,90.794 32.656,90.794 36.236,90.794 37.968,90.794
  other v3: 167.735,4.836 173.873,6.634 176.375,8.009 168.808,16.648 153.401,21.754 158.661,22.32 162.088,23.144 164.249,23.146 157.798,26.48 157.798,27.405 157.798,28.387 157.798,29.312 157.798,30.296 157.798,31.221 164.071,36.355 153.541,41.436 153.541,42.361 153.541,43.361 153.541,44.287 153.568,45.278 153.541,51.756 148.25,52.21 153.541,52.682 153.541,53.682 153.541,54.607 153.568,55.598 177.761,59.72 119.462,60.25 113.553,60.269 113.47,61.644 119.462,61.644 148.25,62.53 162.235,62.983 163.122,62.983 158.87,79.766 152.288,80.742 153.607,81.749 125.284,85.183 135.355,85.183 125.284,86.109 135.355,86.109 125.298,87.099 135.369,87.099 125.298,88.024 135.369,88.024 120.307,88.95 121.232,88.95
GNDF: CON1.1 CON1.2 FL1.3 J10.1 | length 34.1
  Top w1.27: FL1.3@188.642,89.972 188.697,90.028 191.703,90.028 195.249,93.574 203.377,93.574 205.85,91.1 CON1.1@206.1,91.1 CON1.2@206.1,86.9 206.1,80.393 J10.1@203.708,78
I2C_SCL: D2.4 IC6.1 IC10.6 J2.27 R128.1 R151.1 R153.1 TP6.1 | length 46.4
  Top w0.152: TP6.1@167.14,23.374 168.075,23.374 168.509,22.941 R128.1@169.169,22.941 169.773,22.941 169.884,23.052 169.884,25.559 v1(171.006,26.681) ; R151.1@182.742,10.779 R153.1@182.742,11.874 182.742,18.497 178.864,22.374 IC10.6@177.532,22.374 176.638,22.374 175.587,23.426 175.587,25.13 v1(173.868,26.849) IC6.1@173.868,27.531 175.191,27.531 175.81,28.15 D2.4@176.51,28.15 176.571,28.211 176.571,28.764 176.835,29.029 178.7,29.029 179.664,28.065 179.664,24.858 181.744,22.778 J2.27@183.114,22.778
  Bot w0.152: v1(171.006,26.681) 172.392,26.681 172.56,26.849 v1(173.868,26.849)
I2C_SCL.CPCIS: IC12.9 IC12.10 R151.2 | length 5.8
  Top w0.152: IC12.10@181.799,8.055 180.798,8.055 180.709,8.144 180.709,8.705 ; IC12.9@181.799,8.705 180.709,8.705 ; R151.2@181.802,10.779 181.006,10.779 180.709,10.483 180.709,8.705
I2C_SDA: D2.3 IC6.3 IC10.5 J2.26 R126.1 R150.1 R152.1 TP5.1 | length 54.7
  Top w0.152: TP5.1@167.14,20.927 168.097,20.927 168.621,20.403 R126.1@169.169,20.403 169.708,20.403 170.342,21.038 170.342,25.275 172.147,27.079 172.568,27.079 ; v1(182.171,13.505) 182.171,18.334 179.401,21.104 IC10.5@177.532,21.104 176.126,21.104 174.832,22.399 174.832,24.816 172.568,27.079 ; v1(183.258,13.505) 183.895,12.867 R152.1@183.895,11.874 R150.1@183.895,10.779 ; J2.26@185.654,25.318 184.433,24.097 182.278,24.097 180.425,25.95 180.425,28.235 180.182,28.478 179.063,29.597 176.723,29.597 176.51,29.811 D2.3@176.51,30.35 175.587,30.35 174.668,29.431 IC6.3@173.868,29.431 173.022,29.431 172.568,28.977 172.568,27.079
  Bot w0.152: v1(182.171,13.505) v1(183.258,13.505)
I2C_SDA.CPCIS: IC12.2 IC12.3 R150.2 | length 8.4
  Top w0.152: R150.2@184.835,10.779 184.835,9.043 184.534,8.741 184.534,7.57 185.349,6.755 186.509,6.755 ; IC12.2@187.599,6.105 186.598,6.105 186.509,6.194 186.509,6.755 ; IC12.3@187.599,6.755 186.509,6.755
I_VCO: C52.2 IC18.2 R3.1 | length 14.6
  Top w0.15: R3.1@98.799,90.99 C52.2@100.249,90.99 100.249,90.478 100.677,90.05 105.929,90.05 107.693,88.286 110.494,88.286 110.726,88.517 IC18.2@110.726,89.667
Imeas+: IC1.3 NT1.1 | length 8.6
  Top w0.127: IC1.3@97.199,87.215 98.518,87.215 99.076,87.772 100.601,87.772 101.21,87.163 101.21,86.369 100.61,85.769 98.562,85.769 98.4,85.607 NT1.1@98.4,85.46
Imeas-: IC1.4 NT2.1 | length 5.1
  Top w0.127: NT2.1@97.8,85.46 97.8,85.893 98.168,86.26 100.407,86.26 100.718,86.572 100.718,86.993 100.496,87.215 IC1.4@99.799,87.215
IN_CLK0_N: C15.1 IC17.27 R73.2 | length 49
  Top w0.172: IC17.27@33.112,72.14 33.422,72.14 33.522,72.24 35.656,72.24 cw(c35.656,71.64) 36.256,71.64 36.256,70.991 36.256,70.133 cw(c36.084,70.133) 36.084,69.961 36.057,69.961 ccw(c36.057,69.806) 35.902,69.806 35.902,69.343 ccw(c36.057,69.343) 36.057,69.188 36.084,69.188 cw(c36.084,69.016) 36.256,69.016 36.256,68.517 36.256,56.452 cw(c33.716,56.452) 35.513,54.656 35.154,54.297 ccw(c37.159,52.292) 34.323,52.296 ; 34.323,52.292 cw(c37.159,52.292) 34.323,52.296 ; C15.1@34.879,29.842 35.181,29.54 ccw(c35.268,29.627) 35.268,29.504 35.75,29.504 ccw(c35.75,30.011) 36.256,30.011 36.256,30.378 36.256,30.464 ccw(c36.084,30.464) 36.084,30.637 36.024,30.637 cw(c36.024,30.791) 35.87,30.791 35.87,31.255 cw(c36.024,31.255) 36.024,31.409 36.084,31.409 ccw(c36.084,31.581) 36.256,31.581 36.256,31.926 36.256,42.749 ccw(c33.716,42.749) 35.513,44.545 35.154,44.904 cw(c37.16,46.91) 34.323,46.91 34.323,52.296
IN_CLK0_P: C9.1 IC17.28 R74.1 | length 49
  Top w0.172: IC17.28@33.112,72.64 33.422,72.64 33.522,72.539 35.656,72.539 cw(c35.656,71.64) 36.556,71.64 36.556,56.451 cw(c33.72,56.451) 35.725,54.445 35.367,54.087 ccw(c37.163,52.291) 34.623,52.291 34.623,46.911 ccw(c37.163,46.911) 35.367,45.115 35.727,44.755 cw(c33.725,42.753) 36.556,42.753 36.556,30.011 cw(c35.75,30.011) 35.75,29.205 35.268,29.205 ccw(c35.268,29.01) 35.13,29.148 C9.1@34.879,28.896
IN_CLK0C_N: C15.2 IC14.4 | length 2.5
  Top w0.172: IC14.4@31.686,30.106 31.995,30.106 32.138,30.249 33.09,30.249 33.272,30.066 33.755,30.066 C15.2@33.979,29.842
IN_CLK0C_P: C9.2 IC14.1 | length 2.5
  Top w0.172: IC14.1@31.686,28.606 31.995,28.606 32.138,28.463 33.076,28.463 33.285,28.672 33.755,28.672 C9.2@33.979,28.896
LDACn: C64.1 IC37.11 R17.1 | length 100.1
  Top w0.15: IC37.11@128.396,59.121 130.153,59.121 131.575,57.699 C64.1@131.575,55.446 ; v1@168.815,41.644 v1(168.909,41.644) R17.1@169.519,41.644
  Bot w0.15: v1(131.575,56.399) 131.025,56.949 129.636,56.949 129.172,57.413 128.58,57.413 128.137,56.97 126.606,56.97 126.291,56.655 126.291,56.051 127.48,54.862 127.48,51.003 127.48,40.717 132.624,35.573 132.624,34.619 133.266,33.977 134.22,33.977 143.4,24.797 148.98,19.218 163.974,19.218 167.156,22.4 167.156,40.742 168.058,41.644 v1(168.909,41.644)
LVDS0_N: IC34.4 J2.3 R34.1 R162.2 | length 20.7
  Top w0.172: IC34.4@177.532,55.111 178.007,55.111 178.455,54.663 178.807,54.663 178.908,54.764 178.908,54.78 179.112,54.983 R162.2@179.132,54.983 179.152,54.983 179.356,54.78 179.356,54.724 179.416,54.663 179.673,54.663 179.836,54.827 v3(179.925,54.827) ; J2.3@183.114,53.258 184.157,54.301 184.4,54.301 184.588,54.113 185.076,54.113 185.235,54.272 187.345,54.272 188.085,55.012 189.239,55.012 189.525,54.726 R34.1@189.525,54.706
  Bot w0.172: v3(179.925,54.827) 180.014,54.827 180.177,54.663 180.182,54.663 180.327,54.663 180.413,54.663 180.514,54.764 180.514,55.1 180.585,55.17 180.916,55.17 180.987,55.1 180.987,54.764 181.088,54.663 181.258,54.663 181.454,54.468 181.674,54.247 181.674,52.834 182.042,52.467 182.378,52.131 183.755,52.131 184.261,52.636 184.261,54.06 184.16,54.161 184.017,54.161 J2.3@183.114,53.258
LVDS0_P: IC34.3 J2.2 R31.1 R162.1 | length 20.8
  Top w0.172: IC34.3@177.532,53.841 178.007,53.841 178.529,54.364 178.807,54.364 178.908,54.263 178.908,54.247 179.112,54.043 R162.1@179.132,54.043 179.152,54.043 179.356,54.247 179.356,54.303 179.416,54.364 179.673,54.364 179.836,54.2 v3(179.925,54.2) ; J2.2@185.654,55.798 184.611,54.755 184.611,54.513 184.712,54.412 184.952,54.412 185.111,54.571 187.221,54.571 187.961,55.311 189.239,55.311 189.525,55.596 R31.1@189.525,55.616
  Bot w0.172: v3(179.925,54.2) 180.014,54.2 180.177,54.364 180.182,54.364 181.134,54.364 181.375,54.123 181.375,52.71 181.929,52.156 182.254,51.832 183.879,51.832 184.56,52.512 184.56,54.704 J2.2@185.654,55.798
LVDS1_N: IC34.1 J2.6 R36.1 R158.1 | length 18.4
  Top w0.172: IC34.1@177.532,51.301 178.007,51.301 178.221,51.515 178.221,51.543 178.309,51.632 178.309,51.673 178.41,51.774 178.807,51.774 178.908,51.673 178.908,51.658 179.112,51.454 R158.1@179.132,51.454 179.288,51.611 v3(179.848,51.611) ; J2.6@185.654,50.718 184.695,50.718 184.534,50.88 184.534,51.581 184.703,51.75 187.981,51.75 188.852,50.878 189.242,50.878 189.525,50.595 R36.1@189.525,50.575
  Bot w0.172: v3(179.848,51.611) 179.936,51.611 180.1,51.774 180.281,51.774 181.376,50.68 181.376,50.062 181.464,49.975 181.718,49.721 182.104,49.334 183.896,49.334 184.554,49.993 184.554,50.617 184.655,50.718 J2.6@185.654,50.718
LVDS1_P: IC34.2 J2.5 R35.1 R158.2 | length 18.4
  Top w0.172: IC34.2@177.532,52.571 178.007,52.571 178.221,52.358 178.221,52.33 178.352,52.198 178.352,52.187 178.453,52.086 178.649,52.086 178.661,52.074 178.807,52.074 178.908,52.175 178.908,52.19 179.112,52.394 R158.2@179.132,52.394 179.288,52.238 v3(179.848,52.238) ; J2.5@183.114,50.718 184.073,50.718 184.235,50.88 184.235,51.705 184.579,52.049 188.105,52.049 188.976,51.178 189.241,51.178 189.525,51.461 R35.1@189.525,51.481
  Bot w0.172: v3(179.848,52.238) 179.936,52.238 180.1,52.074 180.405,52.074 181.675,50.804 181.675,50.186 182.228,49.634 183.772,49.634 184.255,50.117 184.255,50.617 184.154,50.718 J2.5@183.114,50.718
LVDS2_N: IC4.4 J2.9 R38.1 | length 20.3
  Top w0.172: IC4.4@177.532,48.998 178.007,48.998 178.22,48.784 178.22,48.757 178.464,48.513 178.622,48.513 178.786,48.677 v3(178.875,48.677) ; J2.9@183.114,45.638 184.207,46.731 187.73,46.731 187.912,46.913 189.212,46.913 189.505,46.62 R38.1@189.505,46.6
  Bot w0.172: v3(178.875,48.677) 178.963,48.677 179.127,48.513 180.809,48.513 181.948,47.373 181.948,45.094 182.531,44.511 183.755,44.511 184.261,45.016 184.261,46.44 184.16,46.541 184.017,46.541 J2.9@183.114,45.638
LVDS2_P: IC4.3 J2.8 R37.1 | length 20.8
  Top w0.172: IC4.3@177.532,47.728 178.007,47.728 178.22,47.942 178.22,47.97 178.464,48.214 178.622,48.214 178.786,48.05 v3(178.875,48.05) ; J2.8@185.654,48.178 184.75,47.274 184.75,47.131 184.851,47.031 187.606,47.031 187.788,47.212 189.212,47.212 189.505,47.505 R37.1@189.505,47.525
  Bot w0.172: v3(178.875,48.05) 178.963,48.05 179.127,48.214 180.685,48.214 181.184,47.715 ; 181.184,47.715 181.649,47.249 181.649,45.333 181.649,44.97 182.407,44.212 183.879,44.212 184.56,44.892 184.56,47.084 J2.8@185.654,48.178
LVDS3_N: IC4.1 J2.12 R12.1 R60.1 | length 19.4
  Top w0.172: IC4.1@177.532,45.188 178.007,45.188 178.22,45.402 178.22,45.43 178.307,45.517 178.408,45.618 178.807,45.618 178.91,45.515 178.91,45.5 179.114,45.296 R12.1@179.134,45.296 179.239,45.401 v3(179.864,45.401) ; J2.12@185.654,43.098 184.635,43.098 184.534,43.199 184.534,43.625 185.084,44.175 187.14,44.175 187.691,43.625 187.889,43.427 188.278,43.038 189.262,43.038 189.53,42.77 R60.1@189.53,42.75
  Bot w0.172: v3(179.864,45.401) 179.953,45.401 180.117,45.564 180.373,45.564 180.632,45.305 180.632,43.495 180.72,43.407 182.387,41.741 183.677,41.741 184.534,42.598 184.534,42.997 184.635,43.098 J2.12@185.654,43.098
LVDS3_P: IC4.2 J2.11 R12.2 R59.1 | length 19.4
  Top w0.172: IC4.2@177.532,46.458 178.007,46.458 178.22,46.244 178.22,46.215 178.417,46.018 178.897,46.018 179.114,46.236 R12.2@179.134,46.236 179.338,46.032 179.86,46.032 v3(179.864,46.028) ; J2.11@183.114,43.098 184.134,43.098 184.235,43.199 184.235,43.749 184.96,44.475 187.264,44.475 188.402,43.337 189.262,43.337 189.53,43.605 R59.1@189.53,43.625
  Bot w0.172: v3(179.864,46.028) 179.953,46.028 180.117,45.864 180.497,45.864 180.932,45.429 180.932,43.619 182.511,42.04 183.553,42.04 184.235,42.722 184.235,42.997 184.134,43.098 J2.11@183.114,43.098
LVDS4_N: IC5.4 J2.15 R16.2 R62.1 | length 22.1
  Top w0.172: IC5.4@177.532,42.885 178.007,42.885 178.22,42.671 178.22,42.643 178.508,42.356 178.795,42.356 178.896,42.457 178.896,42.473 179.1,42.676 R16.2@179.12,42.676 179.277,42.52 v3(179.799,42.52) ; J2.15@183.114,38.018 184.207,39.111 187.737,39.111 187.788,39.162 189.263,39.162 189.53,38.895 R62.1@189.53,38.875
  Bot w0.172: v3(179.799,42.52) 179.888,42.52 180.052,42.356 180.523,42.356 180.725,42.154 180.927,41.952 181.929,40.95 181.929,37.443 182.511,36.861 183.872,36.861 184.342,37.331 184.342,38.901 184.241,39.002 184.098,39.002 J2.15@183.114,38.018
LVDS4_P: IC5.3 J2.14 R16.1 R61.1 | length 22.3
  Top w0.172: IC5.3@177.532,41.615 178.007,41.615 178.449,42.057 178.795,42.057 178.896,41.956 178.896,41.94 179.1,41.736 R16.1@179.12,41.736 179.277,41.893 v3(179.799,41.893) ; J2.14@185.654,40.558 184.75,39.654 184.75,39.511 184.851,39.411 187.613,39.411 187.664,39.461 189.256,39.461 189.525,39.73 R61.1@189.525,39.75
  Bot w0.172: v3(179.799,41.893) 179.888,41.893 180.052,42.057 180.399,42.057 181.63,40.826 181.63,37.319 182.387,36.562 183.996,36.562 184.641,37.207 184.641,39.545 J2.14@185.654,40.558
LVDS5_N: IC5.1 J2.18 R14.1 R44.1 | length 21.7
  Top w0.172: IC5.1@177.532,39.075 178.007,39.075 178.22,39.289 178.22,39.316 178.464,39.56 178.611,39.56 178.623,39.572 178.795,39.572 178.896,39.471 178.896,39.455 179.1,39.252 R14.1@179.12,39.252 179.14,39.252 179.344,39.455 179.344,39.55 179.366,39.572 179.643,39.572 179.807,39.408 v3(179.874,39.408) ; J2.18@185.654,35.478 184.693,35.478 184.534,35.637 184.534,36.404 184.685,36.555 186.905,36.555 188.272,35.188 189.262,35.188 189.53,34.92 R44.1@189.53,34.9
  Bot w0.172: v3(179.874,39.408) 179.963,39.408 180.134,39.579 180.358,39.579 180.583,39.354 180.583,35.902 182.407,34.077 183.949,34.077 184.507,34.635 184.507,35.141 184.607,35.242 185.418,35.242 J2.18@185.654,35.478
LVDS5_P: IC5.2 J2.17 R14.2 R63.1 | length 21.7
  Top w0.172: IC5.2@177.532,40.345 178.007,40.345 178.22,40.131 178.22,40.103 178.452,39.871 178.795,39.871 178.896,39.972 178.896,39.988 179.1,40.192 R14.2@179.12,40.192 179.14,40.192 179.344,39.988 179.344,39.893 179.366,39.871 179.622,39.871 179.785,40.035 v3(179.874,40.035) ; J2.17@183.114,35.478 184.076,35.478 184.235,35.637 184.235,36.528 184.561,36.855 187.029,36.855 188.396,35.487 189.262,35.487 189.53,35.755 R63.1@189.53,35.775 ; R63.1@189.465,35.84 189.53,35.905 R63.1@189.53,35.925
  Bot w0.172: v3(179.874,40.035) 179.963,40.035 180.119,39.879 180.482,39.879 180.882,39.478 180.882,36.026 182.531,34.377 183.825,34.377 184.207,34.759 184.207,35.141 184.143,35.205 183.388,35.205 J2.17@183.114,35.478
LVDS6_N: IC7.7 J2.21 R46.1 | length 18
  Top w0.172: IC7.7@177.532,35.096 178.007,35.096 178.221,35.31 178.221,35.338 178.465,35.582 178.623,35.582 178.787,35.418 v3(178.875,35.418) ; J2.21@183.114,30.398 184.207,31.491 186.997,31.491 187.418,31.913 189.262,31.913 189.53,31.645 R46.1@189.53,31.625
  Bot w0.172: v3(178.875,35.418) 178.964,35.418 179.128,35.582 179.342,35.582 179.499,35.424 179.499,34.2 180.972,32.727 182.078,31.621 183.993,31.621 184.094,31.521 184.094,31.378 J2.21@183.114,30.398
LVDS6_P: IC7.8 J2.20 R45.1 | length 17.8
  Top w0.172: IC7.8@177.532,36.366 178.007,36.366 178.221,36.152 178.221,36.125 178.465,35.881 178.623,35.881 178.787,36.045 v3(178.875,36.045) ; J2.20@185.654,32.938 184.75,32.034 184.75,31.891 184.851,31.791 186.873,31.791 187.294,32.212 189.262,32.212 189.53,32.48 R45.1@189.53,32.5
  Bot w0.172: v3(178.875,36.045) 178.964,36.045 179.128,35.881 179.466,35.881 179.711,35.636 179.798,35.548 179.798,34.324 182.201,31.921 184.637,31.921 J2.20@185.654,32.938
LVDS7_N: J2.24 R67.1 R76.2 | length 204.5
  Top w0.172: R76.2@28.116,65.478 R76.2@28.423,65.171 ; R76.2@28.423,65.171 ccw(c28.561,65.308) 28.561,65.114 28.57,65.114 cw(c28.57,64.941) 28.692,65.063 cw(c28.57,64.941) 28.742,64.941 28.742,51.514 ccw(c30.474,51.514) 29.249,50.29 29.251,50.288 ccw(c30.669,51.707) 30.669,49.701 32.023,49.701 v1(32.187,49.537) ; J2.24@185.654,27.858 184.635,27.858 184.534,27.959 184.534,28.385 185.083,28.933 187.194,28.933 187.857,28.271 188.055,28.072 188.627,27.5 189.25,27.5 189.53,27.22 R67.1@189.53,27.2
  Bot w0.172: v1(32.187,49.537) 32.275,49.537 32.439,49.701 39.842,49.701 58.163,31.379 122.197,31.379 136.696,16.881 164.836,16.881 169.268,21.313 169.268,27.435 171.225,29.391 177.482,29.391 180.373,26.501 184.082,26.501 184.534,26.953 184.534,27.757 184.635,27.858 J2.24@185.654,27.858
LVDS7_P: J2.23 R66.1 R78.2 | length 204
  Top w0.172: R78.2@29.361,65.171 cw(c29.223,65.308) 29.223,65.114 29.214,65.114 ccw(c29.214,64.941) 29.092,65.063 ccw(c29.214,64.941) 29.042,64.941 29.042,51.516 ccw(c30.478,51.516) 29.462,50.5 ccw(c30.669,51.707) 30.669,50 32.023,50 v1(32.187,50.164) ; R78.2@29.361,65.171 R78.2@29.668,65.478 ; J2.23@183.114,27.858 184.134,27.858 184.235,27.959 184.235,28.509 184.959,29.233 187.318,29.233 188.751,27.8 189.25,27.8 189.53,28.08 R66.1@189.53,28.1
  Bot w0.172: v1(32.187,50.164) 32.275,50.164 32.439,50 39.966,50 58.287,31.679 122.321,31.679 136.82,17.18 164.712,17.18 168.969,21.437 168.969,27.559 169.056,27.646 171.101,29.691 177.606,29.691 180.497,26.8 183.958,26.8 184.235,27.077 184.235,27.757 184.134,27.858 J2.23@183.114,27.858
NetC2_2: C2.2 C102.1 IC3.1 IC3.2 IC3.3 L1.2 | length 9.5
  Top w0.3: IC3.1@159.36,32.597 160.185,32.597 ; IC3.2@159.36,33.097 160.185,33.097 ; IC3.3@159.36,33.597 159.9,33.597 160.092,33.405 ; C2.2@160.52,30.299 161.418,30.299 ; C2.2@160.52,31.219 161.418,31.219 ; 161.161,27.73 C102.1@161.161,28.702 ; C102.1@161.161,28.631 161.161,29.603 ; 162.087,27.73 C102.1@162.087,28.707 ; C102.1@162.087,28.626 162.087,29.603
  Top w0.5: 162.376,31.974 L1.2@162.376,32.655 163.057,32.655
NetC19_2: C19.2 C75.1 IC36.A2 IC36.B3 IC36.D3 IC36.E2 L12.2 | length 15.7
  Top w0.3: v2(166.692,59.808) IC36.E2@167.327,60.443 ; v2(166.692,66.158) IC36.A2@167.327,65.523 ; v2(167.962,61.078) IC36.D3@168.597,61.713 ; v2(167.962,64.888) IC36.B3@168.597,64.253 ; v3(173.986,61.576) 174.958,61.576 C75.1@174.99,61.608 ; v3(173.986,62.501) 174.963,62.501 C75.1@174.99,62.528 ; 174.411,64.416 L12.2@175.036,64.416 ; 174.411,67.05 L12.2@175.036,67.05 ; 174.424,65.075 L12.2@175.036,65.075 ; 174.424,66.392 L12.2@175.036,66.392 ; 174.439,65.733 L12.2@175.05,65.733 175.661,65.733 ; C75.1@174.981,62.501 v3(175.958,62.501) ; C75.1@174.987,61.576 v3(175.958,61.576) ; L12.2@175.065,64.416 175.689,64.416 ; L12.2@175.065,65.075 175.676,65.075 ; L12.2@175.065,66.392 175.676,66.392 ; L12.2@175.065,67.05 175.689,67.05
  Bot w0.5: 167.768,62.008 C19.2@167.768,62.983 167.768,63.958
NetC24_2: C24.2 U1.F6 | length 1.7
  Top w0.3: v4(167.766,74.632) U1.F6@168.166,75.032
  Bot w0.3: v4(167.766,74.632) C24.2@168.566,75.432